# Altium PCB MEZ_ALL_IND.PcbDoc
Units mm, origin at the board's own origin, x right, y up, seen from the top; angles counter-clockwise.
Board outline 73.5 x 43 mm, 2 copper layers (Top Layer, Bottom Layer); 7 components, 16 nets, 63 pads, 0 vias.
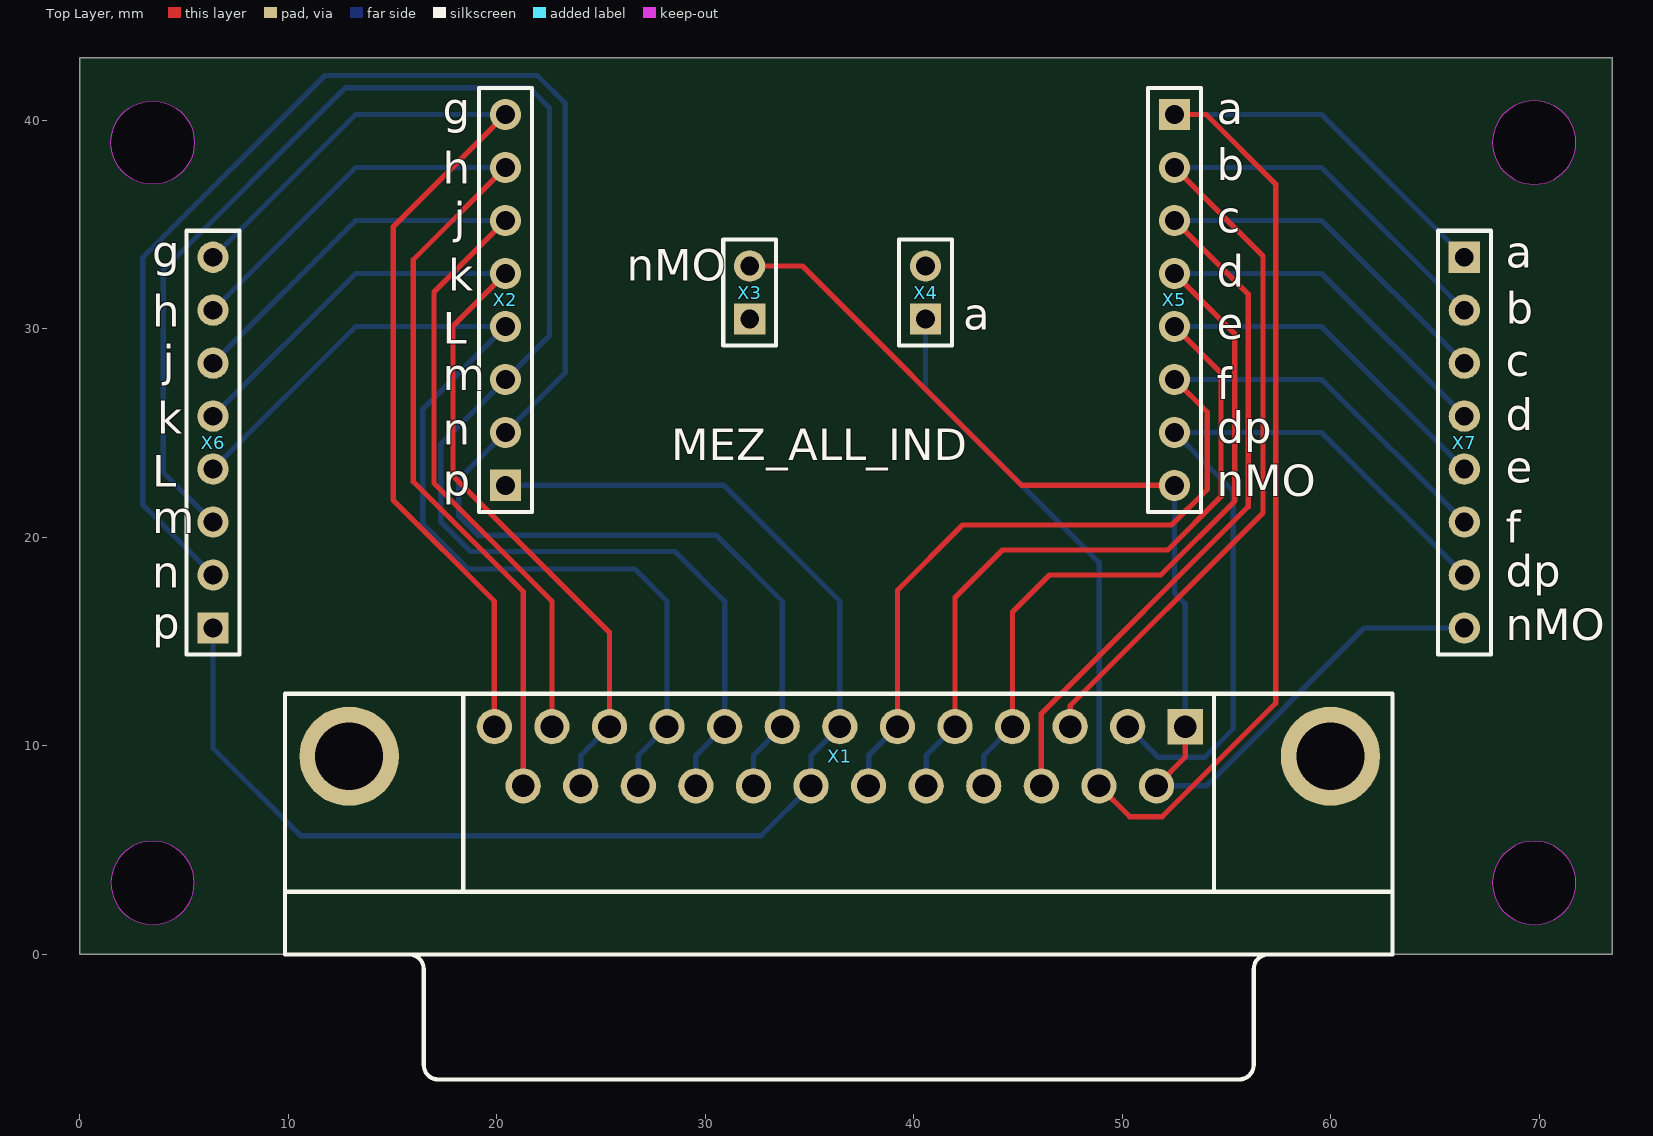
[diagram p0: Top Layer view]
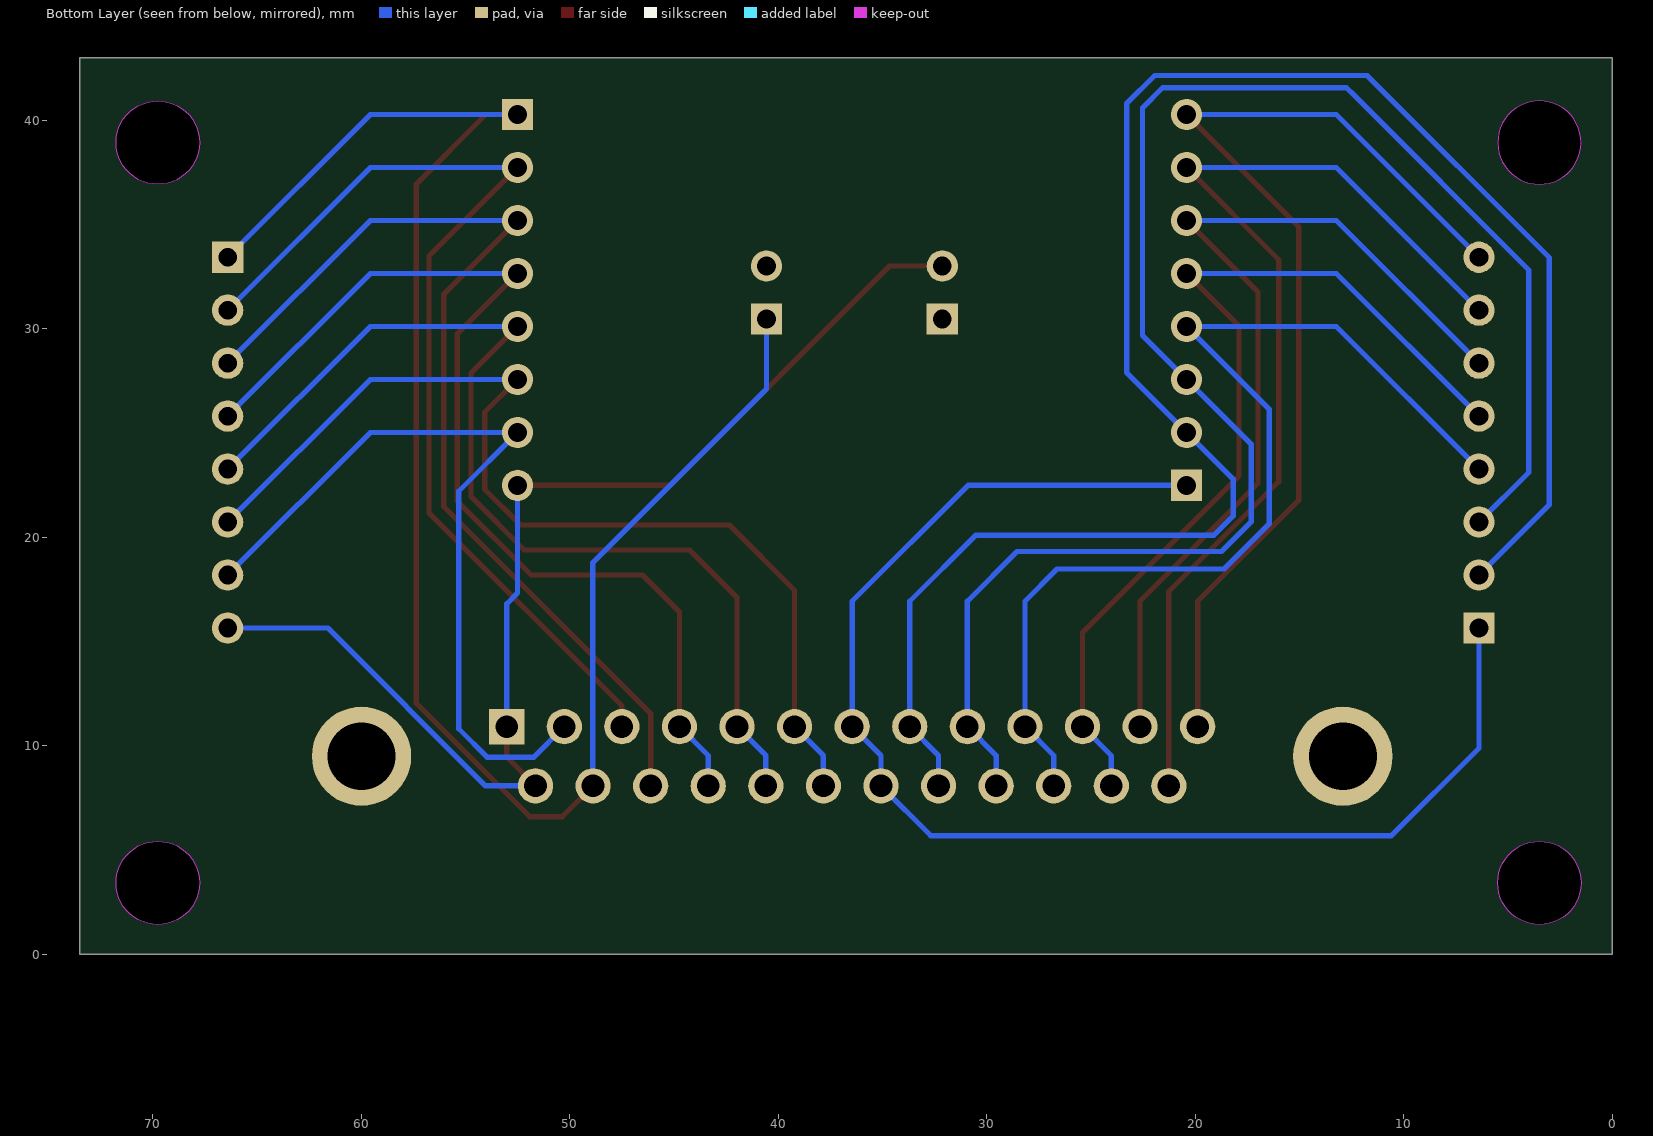
[diagram p1: Bottom Layer view, seen from below]

## Layer stack, top to bottom
Top Solder: solder mask 0.0102, Solder Resist, Dk 3.5
Top Layer: signal copper 0.0356
Dielectric 1: dielectric 0.32, FR-4, Dk 4.8
Bottom Layer: signal copper 0.0356
Bottom Solder: solder mask 0.0102, Solder Resist, Dk 3.5

## Board outline
0,0 73.5,0 73.5,43 0,43
cut-out: 1.5,3.425 ccw(c3.5,3.425) 3.5,1.425 ccw(c3.5,3.425) 5.5,3.425 ccw(c3.5,3.425) 3.5,5.425 ccw(c3.5,3.425)
cut-out: 67.75,3.425 ccw(c69.75,3.425) 69.75,1.425 ccw(c69.75,3.425) 71.75,3.425 ccw(c69.75,3.425) 69.75,5.425 ccw(c69.75,3.425)
cut-out: 67.75,38.925 ccw(c69.75,38.925) 69.75,36.925 ccw(c69.75,38.925) 71.75,38.925 ccw(c69.75,38.925) 69.75,40.925 ccw(c69.75,38.925)
cut-out: 3.5,36.925 cw(c3.5,38.925) 1.5,38.925 cw(c3.5,38.925) 3.5,40.925 cw(c3.5,38.925) 5.5,38.925 cw(c3.5,38.925)

## Design rules (kind name [scope] priority, off if disabled: settings)
Clearance [All] p1: gap=0.254 ignorepadtopadclearanceinfootprint=FALSE except(0: Arc-Hole Track-Hole SMDPad-Hole THPad-Hole Via-Hole Fill-Hole Poly-Hole Region-Hole Text-Hole)
PolygonConnect [All] p1: connectstyle=Relief reliefconductorwidth=0.254 reliefentries=4 polygonreliefangle="90 Angle" airgapwidth=0.254
RoutingVias [All] p1: holewidth=0.711 width=1.27 viastyle="Through Hole" minholewidth=0.711 minwidth=1.27 maxholewidth=0.711 maxwidth=1.27
SolderMaskExpansion [All] p1: expansion=0.102
Width [All] p1: maxlimit=0.254 minlimit=0.254 preferedwidth=0.254
30 further rules are at their usual default settings.

## Components (designator, comment, footprint, x,y, rotation, side; value= is the part's Value field where it differs from the comment)
X1 "D Connector 25" DSUB1.385-2H25A 36.454,-0.001 r180 top
X2 "Header 8" HDR1X8 20.421,22.487 r90 top
X3 "Header 2" HDR1X2 32.13,30.463 r90 top
X4 "Header 2" HDR1X2 40.563,30.463 r90 top
X5 "Header 8" HDR1X8 52.501,40.267 r270 top
X6 "Header 8" HDR1X8 6.401,15.646 r90 top
X7 "Header 8" HDR1X8 66.401,33.426 r270 top

## Footprints (in the part's own frame and the unit in brackets; to place one, negate y for a bottom-side part, rotate by r counter-clockwise, add the part's x,y. Pads: shape width x height; smd on the part's side, far side on the other; paste and mask are expansions set on the pad)
DSUB1.385-2H25A [mm] "Connector; D Subminiature; 25 Position; Right Angle; Pitch 1.385 mm"
  rect 1.69x1.69 hole 1.09: 1(-16.566,-10.92)
  round 1.69 hole 1.09: 2(-13.805,-10.92) 3(-11.044,-10.92) 4(-8.283,-10.92) 5(-5.522,-10.92) 6(-2.761,-10.92) 7(0,-10.92) 8(2.761,-10.92) 9(5.522,-10.92) 10(8.283,-10.92) 11(11.044,-10.92) 12(13.805,-10.92) 13(16.566,-10.92) 14(-15.185,-8.08) 15(-12.424,-8.08) 16(-9.663,-8.08) 17(-6.902,-8.08) 18(-4.141,-8.08) 19(-1.38,-8.08) 20(1.381,-8.08) 21(4.142,-8.08) 22(6.903,-8.08) 23(9.664,-8.08) 24(12.425,-8.08) 25(15.186,-8.08)
  round 4.76 hole 3.26: 26(-23.526,-9.5) 27(23.526,-9.5)
  silkscreen extent -26.5,-12.5 26.6,6
HDR1X2 [mm] "Connector; Header; 2 Position"
  rect 1.5x1.5 hole 0.9: 1(0,0)
  round 1.5 hole 0.9: 2(2.54,0)
  silkscreen extent -1.27,-1.27 3.81,1.27
HDR1X8 [mm] "Connector; Header; 8 Position"
  rect 1.5x1.5 hole 0.9: 1(0,0)
  round 1.5 hole 0.9: 2(2.54,0) 3(5.08,0) 4(7.62,0) 5(10.16,0) 6(12.7,0) 7(15.24,0) 8(17.78,0)
  silkscreen extent -1.27,-1.27 19.05,1.27

## Part data
X1: "Receptacle Assembly, 25 Position, Right Angle", PackageDocument=U, DatasheetDocument=19-Mar-1999, Gender=Receptacle, LatestRevisionDate=17-Jul-2002, LatestRevisionNote="Re-released for DXP Platform.", Orientation="Right Angle", PackageReference=787202, Positions=25, Published=15-Jun-2001, Publisher="Altium Limited"
X2 X5 X6 X7: "Header, 8-Pin", LatestRevisionDate=17-Jul-2002, LatestRevisionNote="Re-released for DXP Platform.", Publisher="Altium Limited"
X3 X4: "Header, 2-Pin", LatestRevisionDate=17-Jul-2002, LatestRevisionNote="Re-released for DXP Platform.", Publisher="Altium Limited"

## Nets (pads, with @x,y where several pads share a name; then routed paths per layer and width w, separated by ;. In a path a pad name is that pad's centre, name@x,y a point inside that pad or via, vN(x,y) a via of type N, cw(c..) or ccw(c..) an arc to the next point about the centre after c; other vN are vias at no path point)
\M\O\: X1.1 X1.14 X3.2 X5.8 X7.8 | length 57.8
  Top Layer w0.254: X3.2 34.663,33.003 45.178,22.487 X5.8 ; X1.14 53.02,9.459 X1.1
  Bottom Layer w0.254: X1.14 54.027,8.079 61.595,15.646 X7.8 ; X5.8 52.501,17.324 53.02,16.805 X1.1
a: X1.15 X4.1 X5.1 X7.1 | length 85
  Top Layer w0.254: X1.15 50.354,6.603 51.917,6.603 57.353,12.04 57.353,36.939 54.025,40.267 X5.1
  Bottom Layer w0.254: X4.1 40.563,27.11 48.889,18.784 X1.15@48.889,8.079 ; X5.1 59.56,40.267 X7.1
b: X1.3 X5.2 X7.2 | length 49.1
  Top Layer w0.254: X1.3 47.498,11.919 56.744,21.165 56.744,33.485 X5.2
  Bottom Layer w0.254: X5.2 59.56,37.727 X7.2
c: X1.16 X5.3 X7.3 | length 49.4
  Top Layer w0.254: X1.16 46.117,11.548 56.032,21.463 56.032,31.656 X5.3
  Bottom Layer w0.254: X5.3 59.56,35.187 X7.3
d: X1.4 X1.17 X5.4 X7.4 | length 50.6
  Top Layer w0.254: X1.4 44.737,16.416 46.507,18.186 51.841,18.186 55.396,21.741 55.396,29.752 X5.4
  Bottom Layer w0.254: X1.17 43.356,9.538 X1.4 ; X5.4 59.56,32.647 X7.4
dp: X1.2 X5.7 X7.7 | length 38.3
  Bottom Layer w0.254: X1.2 51.729,9.448 53.949,9.448 55.32,10.819 55.32,22.208 X5.7 59.56,25.027 X7.7
e: X1.5 X1.18 X5.5 X7.5 | length 50.2
  Top Layer w0.254: X1.5 41.976,17.118 44.246,19.389 52.18,19.389 54.736,21.945 54.736,27.872 X5.5
  Bottom Layer w0.254: X1.18 40.595,9.538 X1.5 ; X5.5 59.56,30.107 X7.5
f: X1.6 X1.19 X5.6 X7.6 | length 49.5
  Top Layer w0.254: X1.6 39.215,17.456 42.341,20.582 52.358,20.582 54.076,22.3 54.076,25.993 X5.6
  Bottom Layer w0.254: X1.19 37.834,9.538 X1.6 ; X5.6 59.56,27.567 X7.6
g: X1.13 X2.8 X6.8 | length 50.4
  Top Layer w0.254: X1.13 19.888,16.931 15.036,21.783 15.036,34.883 X2.8
  Bottom Layer w0.254: X6.8 13.242,40.267 X2.8
h: X1.25 X2.7 X6.7 | length 50.5
  Top Layer w0.254: X2.7 16.001,33.308 16.001,22.665 21.279,17.387 X1.25@21.279,8.079
  Bottom Layer w0.254: X6.7 13.242,37.727 X2.7
j: X1.12 X2.6 X6.6 | length 44.9
  Top Layer w0.254: X2.6 16.992,31.758 16.992,22.588 22.649,16.931 X1.12
  Bottom Layer w0.254: X6.6 13.242,35.187 X2.6
k: X1.11 X1.24 X2.5 X6.5 | length 46.1
  Top Layer w0.254: X2.5 17.906,30.133 17.906,22.945 25.41,15.441 X1.11
  Bottom Layer w0.254: X6.5 13.242,32.647 X2.5 ; X1.24 24.029,9.538 X1.11
l: X1.10 X1.23 X2.4 X6.4 | length 50.6
  Bottom Layer w0.254: X6.4 13.242,30.107 X2.4 16.458,26.145 16.458,20.633 18.617,18.474 26.627,18.474 28.171,16.931 X1.10 26.79,9.538 X1.23
m: X1.9 X1.22 X2.3 X6.3 | length 82.2
  Bottom Layer w0.254: X6.3 4.013,23.114 4.013,32.817 12.395,41.199 12.751,41.554 21.565,41.554 22.53,40.589 22.53,29.677 X2.3 17.322,24.469 17.322,20.735 18.744,19.312 28.55,19.312 30.932,16.931 X1.9 29.551,9.538 X1.22
n: X1.8 X1.21 X2.2 X6.2 | length 89.6
  Bottom Layer w0.254: X6.2 3.023,21.565 3.023,33.401 11.76,42.139 21.946,42.139 23.292,40.792 23.292,27.899 X2.2 18.185,22.792 18.185,21.014 19.1,20.1 30.524,20.1 33.693,16.931 X1.8 32.312,9.538 X1.21
p: X1.7 X1.20 X2.1 X6.1 | length 64.9
  Bottom Layer w0.254: X6.1 6.401,9.881 10.592,5.69 32.684,5.69 X1.20 35.073,9.538 X1.7 36.454,16.931 30.897,22.487 X2.1
pads on no net: X1.26 X1.27 X3.1 X4.2

## Silkscreen, mask and mechanical layers (free items; w line width, h text height)
Top Overlay:
  text "g" at 17.423,39.81 h1.52
  text "a" at 54.533,39.81 h1.52
  text "b" at 54.533,37.118 h1.52
  text "h" at 17.423,36.94 h1.52
  text "c" at 54.533,34.603 h1.52
  text "j" at 17.931,34.552 h1.52
  text "g" at 3.479,32.952 h1.52
  text "a" at 68.376,32.927 h1.52
  text "nMO" at 26.237,32.292 h1.52
  text "d" at 54.533,32.012 h1.52
  text "k" at 17.677,31.809 h1.52
  text "b" at 68.376,30.234 h1.52
  text "h" at 3.479,30.082 h1.52
  text "a" at 42.366,29.955 h1.52
  text "e" at 54.533,29.498 h1.52
  text "L" at 17.423,29.269 h1.52
  text "c" at 68.376,27.72 h1.52
  text "j" at 3.987,27.694 h1.52
  text "m" at 17.423,27.059 h1.52
  text "f" at 54.533,26.628 h1.52
  text "d" at 68.376,25.129 h1.52
  text "k" at 3.733,24.951 h1.52
  text "dp" at 54.534,24.511 h1.52
  text "n" at 17.423,24.443 h1.52
  text "MEZ_ALL_IND" at 28.365,23.682 h1.52
  text "e" at 68.376,22.614 h1.52
  text "L" at 3.479,22.411 h1.52
  text "p" at 17.423,21.979 h1.52
  text "nMO" at 54.533,21.954 h1.52
  text "m" at 3.479,20.201 h1.52
  text "f" at 68.376,19.744 h1.52
  text "dp" at 68.377,17.628 h1.52
  text "n" at 3.479,17.585 h1.52
  text "p" at 3.479,15.121 h1.52
  text "nMO" at 68.376,15.071 h1.52
Mechanical 1:
  circle w0.254: c69.75,3.425 r2
  circle w0.254: c3.5,3.425 r2
  circle w0.254: c69.75,38.925 r2
  circle w0.254: c3.5,38.925 r2
  lines w0.254: 0,0 73.5,0 73.5,43 0,43 0,0